# Altium PCB SOUL_EEG_PCB_Rev1.PcbDoc (part 2 of 2)
Units mil, origin at the board's own origin, x right, y up, seen from the top; angles counter-clockwise.
Board outline 3125 x 4300 mil, 4 copper layers (Top Layer, Upper Signal Layer, Lower Signal Layer, Bottom Layer), stack 30.635 mil thick; 183 components, 219 nets, 853 pads, 303 vias.
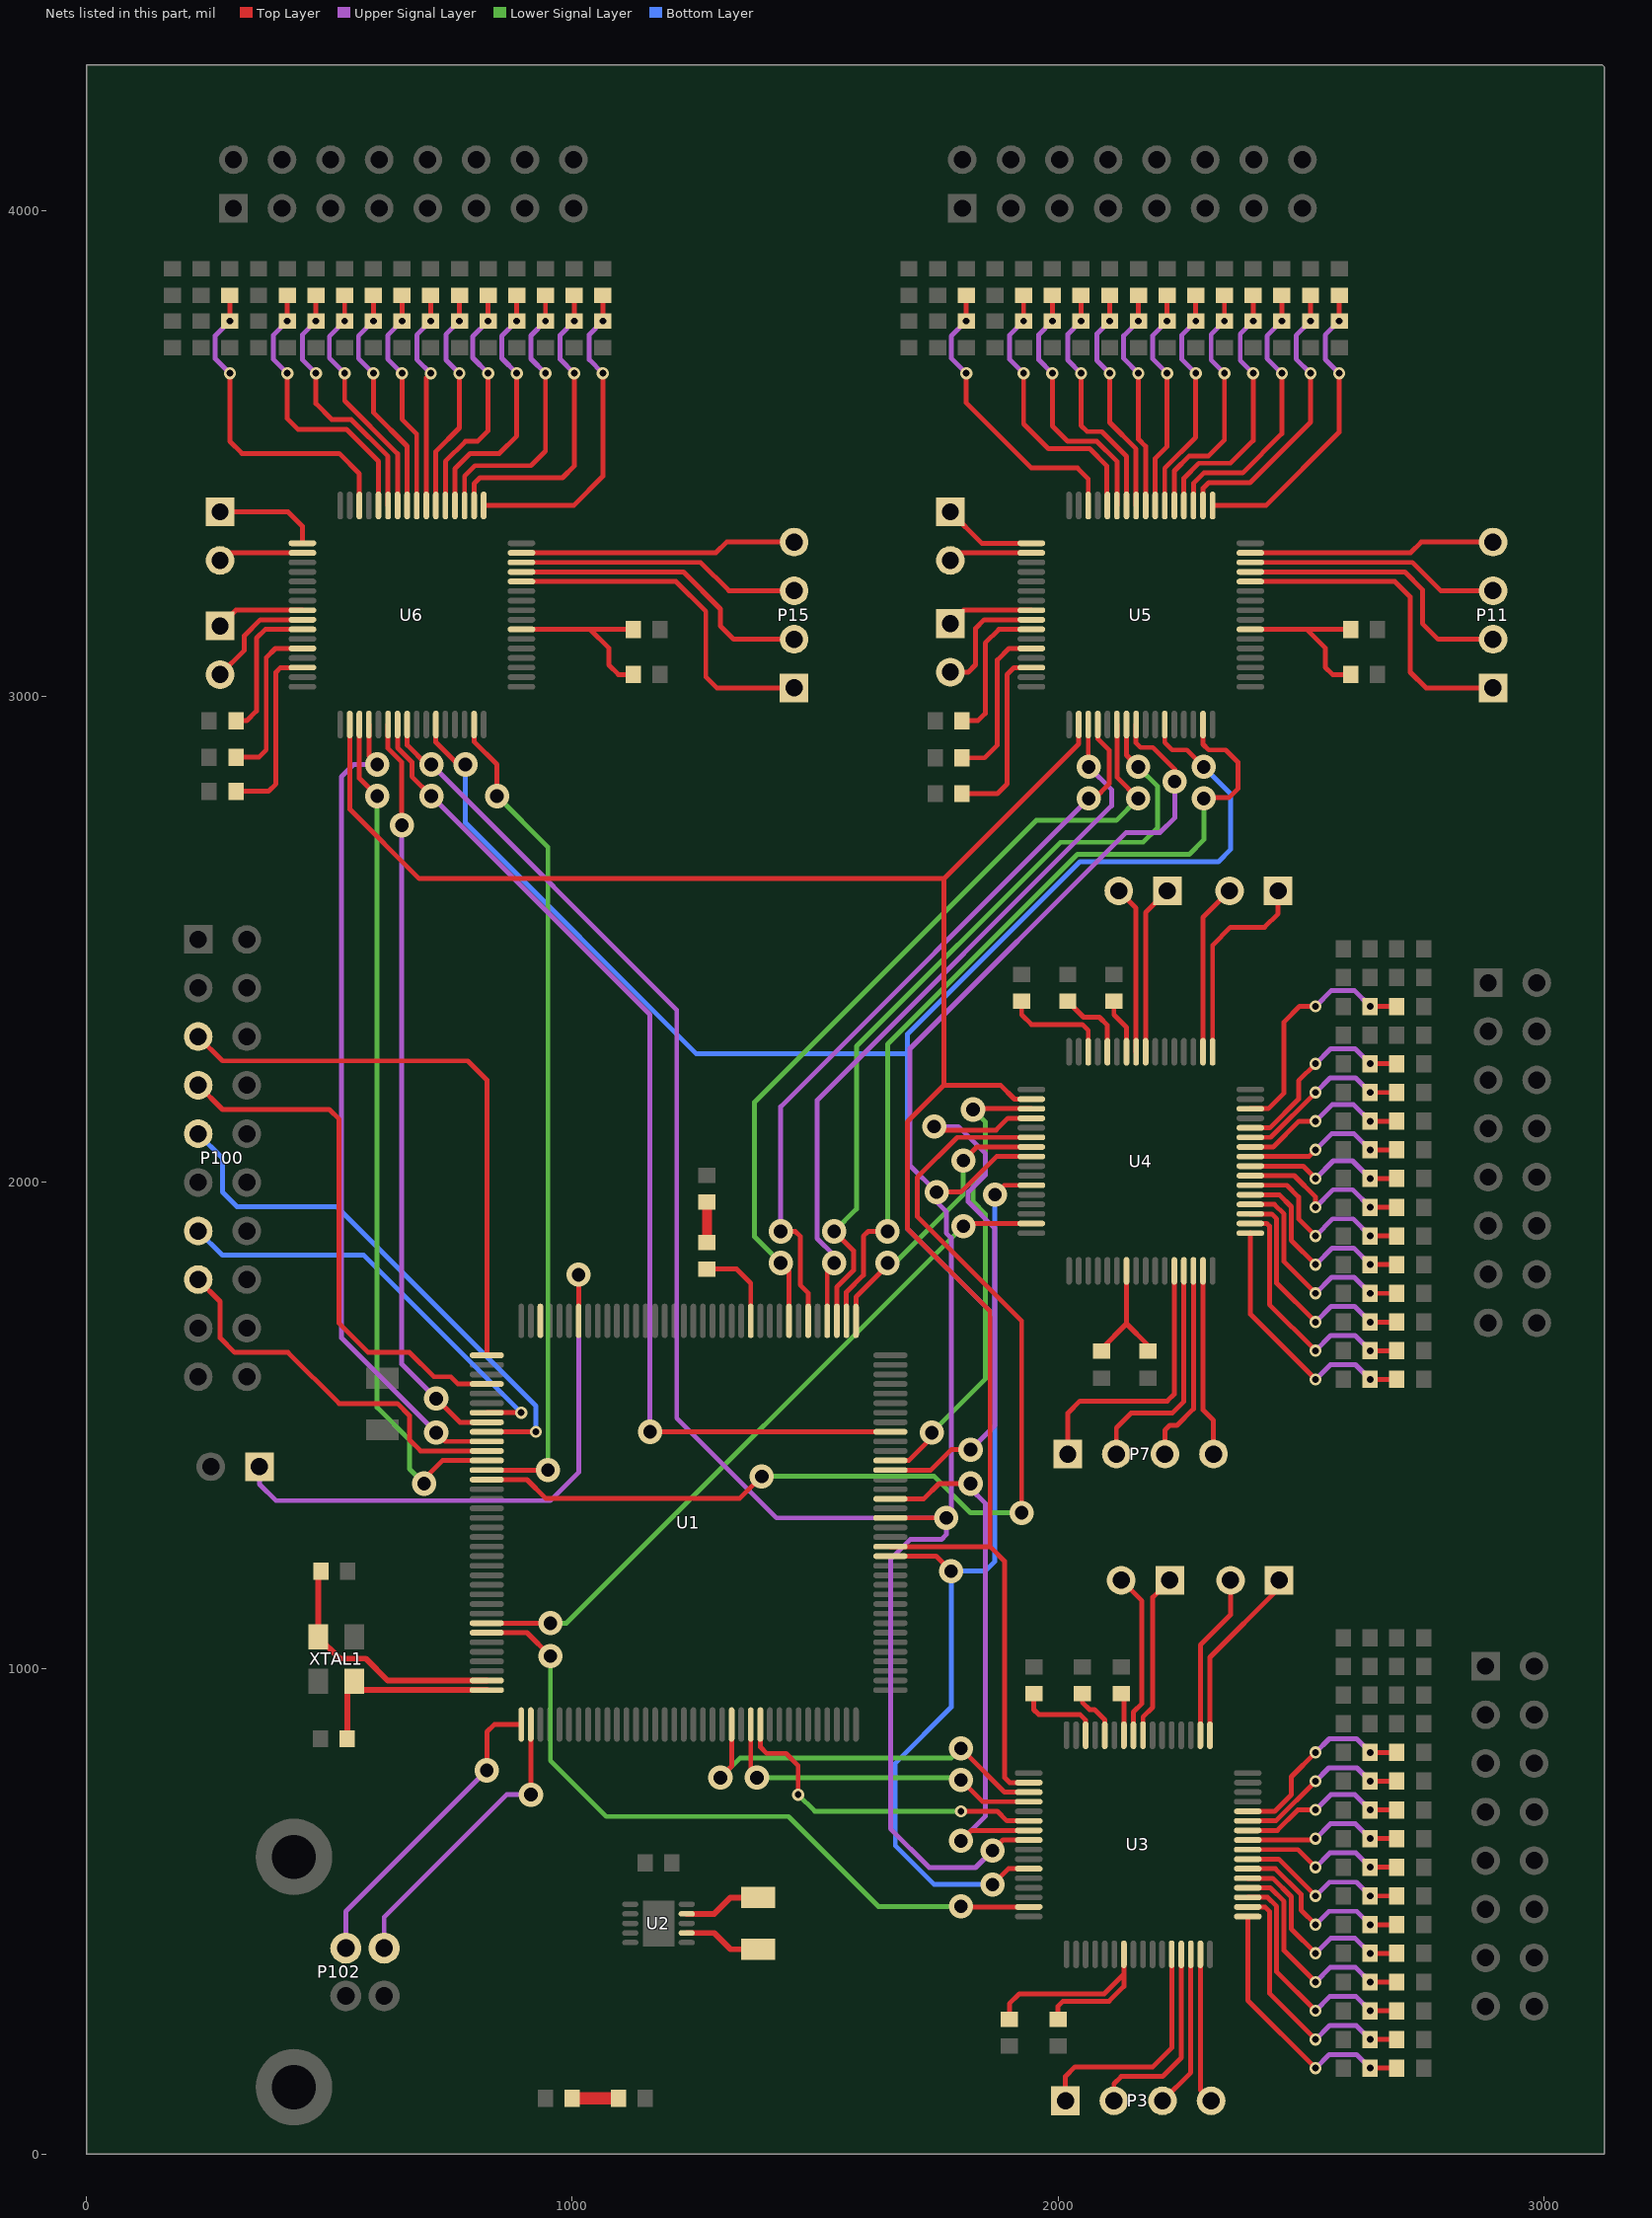
[diagram p4: the nets of this part, all layers, seen from the top]

## Via types
v1: diameter 25, hole 14, Top Layer to Bottom Layer, 218 vias
v2: diameter 50, hole 28, Top Layer to Bottom Layer, 80 vias
v3: diameter 19.68, hole 7.87, Top Layer to Bottom Layer, 5 vias

## Nets (pads, with @x,y where several pads share a name; then routed paths per layer and width w, separated by ;. In a path a pad name is that pad's centre, name@x,y a point inside that pad or via, vN(x,y) a via of type N, cw(c..) or ccw(c..) an arc to the next point about the centre after c; other vN are vias at no path point) (continued)
IN2P_2: C24.2 R19.1 U4.14 | length 501.8
  Top Layer w10: U4.14@2395.79,2151.61 2432.94,2151.61 2465,2183.68 2465,2330 2497.2,2362.2 v1(2530,2362.2) ; v1(2642.56,2362.2) R19.1@2697.44,2362.2
  Upper Signal Layer w10: v1(2530,2362.2) 2562.8,2395 2609.76,2395 v1(2642.56,2362.2)
IN2P_3: C45.2 R35.1 U5.14 | length 617.4
  Top Layer w10: v1(1811.02,3665) 1811.02,3603.98 1945,3470 2040,3470 2062.13,3447.87 U5.14@2062.13,3393.03 ; v1(1811.02,3772.56) R35.1@1811.02,3825.08
  Upper Signal Layer w10: v1(1811.02,3665) 1780,3696.02 1780,3741.54 v1(1811.02,3772.56)
IN2P_4: C66.2 R51.1 U6.14 | length 684.7
  Top Layer w10: v1(295.28,3665) 295.28,3524.72 320,3500 520,3500 561.73,3458.27 U6.14@561.73,3393.03 ; v1(295.28,3772.56) R51.1@295.28,3825.08
  Upper Signal Layer w10: v1(295.28,3665) 265,3695.28 265,3742.28 v1(295.28,3772.56)
IN3N_1: C6.1 R6.1 U3.11 | length 363.5
  Top Layer w10: U3.11@2390.39,686.06 2448.35,686.06 v1(2530,767.72) ; v1(2642.56,767.72) 2676.69,767.72 R6.1@2697.44,767.72
  Upper Signal Layer w10: v1(2530,767.72) 2557.28,795 2615.28,795 v1(2642.56,767.72)
IN3N_2: C27.1 R22.1 U4.11 | length 364.8
  Top Layer w10: U4.11@2395.79,2092.56 2437.52,2092.56 v1(2530,2185.04) ; v1(2642.56,2185.04) R22.1@2697.44,2185.04
  Upper Signal Layer w10: v1(2530,2185.04) 2559.96,2215 2612.6,2215 v1(2642.56,2185.04)
IN3N_3: C48.1 R38.1 U5.11 | length 545.6
  Top Layer w10: v1(1988.19,3665) 1988.19,3556.81 2020,3525 2080,3525 2121.18,3483.82 U5.11@2121.18,3393.03 ; v1(1988.19,3772.56) R38.1@1988.19,3825.08
  Upper Signal Layer w10: v1(1988.19,3665) 1960,3693.19 1960,3744.37 v1(1988.19,3772.56)
IN3N_4: C69.1 R54.1 U6.11 | length 539.7
  Top Layer w10: v1(472.44,3665) 472.44,3602.56 505,3570 545,3570 620.79,3494.21 U6.11@620.79,3393.03 ; v1(472.44,3772.56) R54.1@472.44,3825.08
  Upper Signal Layer w10: v1(472.44,3665) 445,3692.44 445,3745.12 v1(472.44,3772.56)
IN3P_1: C5.2 R5.1 U3.12 | length 402.1
  Top Layer w10: U3.12@2390.39,705.75 2445.75,705.75 2480,740 2480,776.77 v1(2530,826.77) ; v1(2642.56,826.77) R5.1@2697.44,826.77
  Upper Signal Layer w10: v1(2530,826.77) 2558.23,855 2614.33,855 v1(2642.56,826.77)
IN3P_2: C26.2 R21.1 U4.12 | length 404
  Top Layer w10: U4.12@2395.79,2112.24 2435.99,2112.24 2495,2171.25 2495,2209.09 v1(2530,2244.09) ; v1(2642.56,2244.09) R21.1@2697.44,2244.09
  Upper Signal Layer w10: v1(2530,2244.09) 2560.91,2275 2611.65,2275 v1(2642.56,2244.09)
IN3P_3: C47.2 R37.1 U5.12 | length 577.4
  Top Layer w10: v1(1929.13,3665) 1929.13,3560.87 1980,3510 2065,3510 2100,3475 2100,3394.53 U5.12@2101.5,3393.03 ; v1(1929.13,3772.56) R37.1@1929.13,3825.08
  Upper Signal Layer w10: v1(1929.13,3665) 1900,3694.13 1900,3743.43 v1(1929.13,3772.56)
IN3P_4: C68.2 R53.1 U6.12 | length 591.9
  Top Layer w10: v1(413.39,3665) 413.39,3571.61 435,3550 535,3550 601.1,3483.9 U6.12@601.1,3393.03 ; v1(413.39,3772.56) R53.1@413.39,3825.08
  Upper Signal Layer w10: v1(413.39,3665) 385,3693.39 385,3744.17 v1(413.39,3772.56)
IN4N_1: C8.1 R8.1 U3.9 | length 333.4
  Top Layer w10: U3.9@2390.39,646.69 2527.09,646.69 v1(2530,649.61) ; v1(2642.56,649.61) 2676.69,649.61 R8.1@2697.44,649.61
  Upper Signal Layer w10: v1(2530,649.61) 2560.39,680 2612.17,680 v1(2642.56,649.61)
IN4N_2: C29.1 R24.1 U4.9 | length 334.7
  Top Layer w10: U4.9@2395.79,2053.19 2516.26,2053.19 v1(2530,2066.93) ; v1(2642.56,2066.93) R24.1@2697.44,2066.93
  Upper Signal Layer w10: v1(2530,2066.93) 2563.07,2100 2609.49,2100 v1(2642.56,2066.93)
IN4N_3: C50.1 R40.1 U5.9 | length 476.3
  Top Layer w10: v1(2106.3,3665) 2106.3,3563.7 2160.55,3509.45 U5.9@2160.55,3393.03 ; v1(2106.3,3772.56) R40.1@2106.3,3825.08
  Upper Signal Layer w10: v1(2106.3,3665) 2080,3691.3 2080,3746.26 v1(2106.3,3772.56)
IN4N_4: C71.1 R56.1 U6.9 | length 486.2
  Top Layer w10: v1(590.55,3665) 590.55,3584.45 660,3515 660,3393.19 U6.9@660.16,3393.03 ; v1(590.55,3772.56) R56.1@590.55,3825.08
  Upper Signal Layer w10: v1(590.55,3665) 560,3695.55 560,3742.01 v1(590.55,3772.56)
IN4P_1: C7.2 R7.1 U3.10 | length 350.5
  Top Layer w10: U3.10@2390.39,666.38 2451.38,666.38 2493.66,708.66 v1(2530,708.66) ; v1(2642.56,708.66) R7.1@2697.44,708.66
  Upper Signal Layer w10: v1(2530,708.66) 2561.34,740 2611.22,740 v1(2642.56,708.66)
IN4P_2: C28.2 R23.1 U4.10 | length 351.8
  Top Layer w10: U4.10@2395.79,2072.87 2442.87,2072.87 2495.98,2125.98 v1(2530,2125.98) ; v1(2642.56,2125.98) R23.1@2697.44,2125.98
  Upper Signal Layer w10: v1(2530,2125.98) 2564.02,2160 2608.54,2160 v1(2642.56,2125.98)
IN4P_3: C49.2 R39.1 U5.10 | length 511
  Top Layer w10: v1(2047.24,3665) 2047.24,3557.76 2060,3545 2090,3545 2140.87,3494.13 U5.10@2140.87,3393.03 ; v1(2047.24,3772.56) R39.1@2047.24,3825.08
  Upper Signal Layer w10: v1(2047.24,3665) 2020,3692.24 2020,3745.32 v1(2047.24,3772.56)
IN4P_4: C70.2 R55.1 U6.10 | length 503.3
  Top Layer w10: v1(531.5,3665) 531.5,3608.5 640.47,3499.53 U6.10@640.47,3393.03 ; v1(531.5,3772.56) R55.1@531.5,3825.08
  Upper Signal Layer w10: v1(531.5,3665) 500,3696.5 500,3741.06 v1(531.5,3772.56)
IN5N_1: C10.1 R10.1 U3.7 | length 362.1
  Top Layer w10: U3.7@2390.39,607.32 2454.17,607.32 v1(2530,531.5) ; v1(2642.56,531.5) 2663.31,531.5 R10.1@2697.44,531.5
  Upper Signal Layer w10: v1(2530,531.5) 2558.5,560 2614.05,560 v1(2642.56,531.5)
IN5N_2: C31.1 R26.1 U4.7 | length 371
  Top Layer w10: U4.7@2395.79,2013.82 2486.18,2013.82 2530,1970 v1(2530,1948.82) ; v1(2642.56,1948.82) R26.1@2697.44,1948.82
  Upper Signal Layer w10: v1(2530,1948.82) 2566.18,1985 2606.38,1985 v1(2642.56,1948.82)
IN5N_3: C52.1 R42.1 U5.7 | length 466.6
  Top Layer w10: U5.7@2199.92,3393.03 2199.92,3489.92 2224.41,3514.41 v1(2224.41,3665) ; v1(2224.41,3772.56) R42.1@2224.41,3825.08
  Upper Signal Layer w10: v1(2224.41,3665) 2195,3694.41 2195,3743.15 v1(2224.41,3772.56)
IN5N_4: C73.1 R58.1 U6.7 | length 459.6
  Top Layer w10: U6.7@699.53,3393.03 699.53,3655.87 v1(708.66,3665) ; v1(708.66,3772.56) R58.1@708.66,3825.08
  Upper Signal Layer w10: v1(708.66,3665) 680,3693.66 680,3743.9 v1(708.66,3772.56)
IN5P_1: C9.2 R9.1 U3.8 | length 346.5
  Top Layer w10: U3.8@2390.39,627.01 2493.54,627.01 v1(2530,590.55) ; v1(2642.56,590.55) R9.1@2697.44,590.55
  Upper Signal Layer w10: v1(2530,590.55) 2559.45,620 2613.11,620 v1(2642.56,590.55)
IN5P_2: C30.2 R25.1 U4.8 | length 342.6
  Top Layer w10: U4.8@2395.79,2033.5 2504.37,2033.5 v1(2530,2007.87) ; v1(2642.56,2007.87) R25.1@2697.44,2007.87
  Upper Signal Layer w10: v1(2530,2007.87) 2566.55,2044.43 2606,2044.43 v1(2642.56,2007.87)
IN5P_3: C51.2 R41.1 U5.8 | length 463.4
  Top Layer w10: v1(2165.35,3665) 2165.35,3529.65 2180.24,3514.76 U5.8@2180.24,3393.03 ; v1(2165.35,3772.56) R41.1@2165.35,3825.08
  Upper Signal Layer w10: v1(2165.35,3665) 2135,3695.35 2135,3742.2 v1(2165.35,3772.56)
IN5P_4: C72.2 R57.1 U6.8 | length 469.1
  Top Layer w10: v1(649.61,3665) 649.61,3570.39 679.84,3540.16 U6.8@679.84,3393.03 ; v1(649.61,3772.56) R57.1@649.61,3825.08
  Upper Signal Layer w10: v1(649.61,3665) 620,3694.61 620,3742.95 v1(649.61,3772.56)
IN6N_1: C12.1 R12.1 U3.5 | length 436.3
  Top Layer w10: U3.5@2390.39,567.95 2442.05,567.95 2480,530 2480,463.39 v1(2530,413.39) ; v1(2642.56,413.39) 2676.69,413.39 R12.1@2697.44,413.39
  Upper Signal Layer w10: v1(2530,413.39) 2561.61,445 2610.94,445 v1(2642.56,413.39)
IN6N_2: C33.1 R28.1 U4.5 | length 430.2
  Top Layer w10: U4.5@2395.79,1974.45 2455.55,1974.45 2480,1950 2480,1880.71 v1(2530,1830.71) ; v1(2642.56,1830.71) R28.1@2697.44,1830.71
  Upper Signal Layer w10: v1(2530,1830.71) 2564.29,1865 2608.27,1865 v1(2642.56,1830.71)
IN6N_3: C54.1 R44.1 U5.5 | length 521
  Top Layer w10: U5.5@2239.29,3393.03 2239.29,3464.29 2270,3495 2310,3495 2342.52,3527.52 v1(2342.52,3665) ; v1(2342.52,3772.56) R44.1@2342.52,3825.08
  Upper Signal Layer w10: v1(2342.52,3665) 2315,3692.52 2315,3745.04 v1(2342.52,3772.56)
IN6N_4: C75.1 R60.1 U6.5 | length 509.4
  Top Layer w10: U6.5@738.9,3393.03 738.9,3483.9 780,3525 805,3525 826.77,3546.77 v1(826.77,3665) ; v1(826.77,3772.56) R60.1@826.77,3825.08
  Upper Signal Layer w10: v1(826.77,3665) 795,3696.77 795,3740.79 v1(826.77,3772.56)
IN6P_1: C11.2 R11.1 U3.6 | length 396.7
  Top Layer w10: U3.6@2390.39,587.64 2447.36,587.64 2500,535 2500,502.44 v1(2530,472.44) ; v1(2642.56,472.44) R11.1@2697.44,472.44
  Upper Signal Layer w10: v1(2530,472.44) 2557.56,500 2615,500 v1(2642.56,472.44)
IN6P_2: C32.2 R27.1 U4.6 | length 400.6
  Top Layer w10: U4.6@2395.79,1994.13 2470.87,1994.13 2495,1970 2495,1924.76 v1(2530,1889.76) ; v1(2642.56,1889.76) R27.1@2697.44,1889.76
  Upper Signal Layer w10: v1(2530,1889.76) 2565.24,1925 2607.32,1925 v1(2642.56,1889.76)
IN6P_3: C53.2 R43.1 U5.6 | length 482.1
  Top Layer w10: U5.6@2219.61,3393.03 2219.61,3469.61 2283.46,3533.46 v1(2283.46,3665) ; v1(2283.46,3772.56) R43.1@2283.46,3825.08
  Upper Signal Layer w10: v1(2283.46,3665) 2255,3693.46 2255,3744.09 v1(2283.46,3772.56)
IN6P_4: C74.2 R59.1 U6.6 | length 475.1
  Top Layer w10: U6.6@719.21,3393.03 719.21,3504.21 767.72,3552.72 v1(767.72,3665) ; v1(767.72,3772.56) R59.1@767.72,3825.08
  Upper Signal Layer w10: v1(767.72,3665) 740,3692.72 740,3744.84 v1(767.72,3772.56)
IN7N_1: C14.1 R14.1 U3.3 | length 507.2
  Top Layer w10: U3.3@2390.39,528.58 2431.42,528.58 2450,510 2450,375.28 v1(2530,295.28) ; v1(2642.56,295.28) 2676.69,295.28 R14.1@2697.44,295.28
  Upper Signal Layer w10: v1(2530,295.28) 2559.72,325 2612.83,325 v1(2642.56,295.28)
IN7N_2: C35.1 R30.1 U4.3 | length 498.2
  Top Layer w10: U4.3@2395.79,1935.08 2439.92,1935.08 2450,1925 2450,1792.6 v1(2530,1712.6) ; v1(2642.56,1712.6) R30.1@2697.44,1712.6
  Upper Signal Layer w10: v1(2530,1712.6) 2562.4,1745 2610.16,1745 v1(2642.56,1712.6)
IN7N_3: C56.1 R46.1 U5.3 | length 579.7
  Top Layer w10: U5.3@2278.66,3393.03 2278.66,3438.66 2300,3460 2380,3460 2460.63,3540.63 v1(2460.63,3665) ; v1(2460.63,3772.56) R46.1@2460.63,3825.08
  Upper Signal Layer w10: v1(2460.63,3665) 2430,3695.63 2430,3741.93 v1(2460.63,3772.56)
IN7N_4: C77.1 R62.1 U6.3 | length 593.2
  Top Layer w10: U6.3@778.27,3393.03 778.27,3453.27 800,3475 915,3475 944.88,3504.88 v1(944.88,3665) ; v1(944.88,3772.56) R62.1@944.88,3825.08
  Upper Signal Layer w10: v1(944.88,3665) 915,3694.88 915,3742.68 v1(944.88,3772.56)
IN7P_1: C13.2 R13.1 U3.4 | length 471.8
  Top Layer w10: U3.4@2390.39,548.27 2436.73,548.27 2465,520 2465,419.33 v1(2530,354.33) ; v1(2642.56,354.33) R13.1@2697.44,354.33
  Upper Signal Layer w10: v1(2530,354.33) 2560.67,385 2611.89,385 v1(2642.56,354.33)
IN7P_2: C34.2 R29.1 U4.4 | length 462.7
  Top Layer w10: U4.4@2395.79,1954.76 2445.24,1954.76 2465,1935 2465,1836.65 v1(2530,1771.65) ; v1(2642.56,1771.65) R29.1@2697.44,1771.65
  Upper Signal Layer w10: v1(2530,1771.65) 2563.35,1805 2609.21,1805 v1(2642.56,1771.65)
IN7P_3: C55.2 R45.1 U5.4 | length 551.2
  Top Layer w10: U5.4@2258.98,3393.03 2258.98,3448.98 2290,3480 2355,3480 2401.57,3526.57 v1(2401.57,3665) ; v1(2401.57,3772.56) R45.1@2401.57,3825.08
  Upper Signal Layer w10: v1(2401.57,3665) 2375,3691.57 2375,3745.98 v1(2401.57,3772.56)
IN7P_4: C76.2 R61.1 U6.4 | length 545.4
  Top Layer w10: U6.4@758.58,3393.03 758.58,3468.58 790,3500 850,3500 885.83,3535.83 v1(885.83,3665) ; v1(885.83,3772.56) R61.1@885.83,3825.08
  Upper Signal Layer w10: v1(885.83,3665) 855,3695.83 855,3741.73 v1(885.83,3772.56)
IN8N_1: C16.1 R16.1 U3.1 | length 560.4
  Top Layer w10: U3.1@2390.39,489.21 2390.39,316.77 v1(2530,177.17) ; v1(2642.56,177.17) 2663.31,177.17 R16.1@2697.44,177.17
  Upper Signal Layer w10: v1(2530,177.17) 2557.83,205 2614.72,205 v1(2642.56,177.17)
IN8N_2: C37.1 R32.1 U4.1 | length 549.5
  Top Layer w10: U4.1@2395.79,1895.71 2395.79,1728.7 v1(2530,1594.49) ; v1(2642.56,1594.49) R32.1@2697.44,1594.49
  Upper Signal Layer w10: v1(2530,1594.49) 2560.51,1625 2612.05,1625 v1(2642.56,1594.49)
IN8N_3: C58.1 R48.1 U5.1 | length 628.3
  Top Layer w10: U5.1@2318.03,3393.03 2428.03,3393.03 2578.74,3543.74 v1(2578.74,3665) ; v1(2578.74,3772.56) R48.1@2578.74,3825.08
  Upper Signal Layer w10: v1(2578.74,3665) 2550,3693.74 2550,3743.82 v1(2578.74,3772.56)
IN8N_4: C79.1 R64.1 U6.1 | length 665.5
  Top Layer w10: U6.1@817.64,3393.03 1003.03,3393.03 1062.99,3452.99 v1(1062.99,3665) ; v1(1062.99,3772.56) R64.1@1062.99,3825.08
  Upper Signal Layer w10: v1(1062.99,3665) 1035,3692.99 1035,3744.57 v1(1062.99,3772.56)
IN8P_1: C15.2 R15.1 U3.2 | length 542.7
  Top Layer w10: U3.2@2390.39,508.9 2426.1,508.9 2435,500 2435,331.22 v1(2530,236.22) ; v1(2642.56,236.22) R15.1@2697.44,236.22
  Upper Signal Layer w10: v1(2530,236.22) 2558.78,265 2613.78,265 v1(2642.56,236.22)
IN8P_2: C36.2 R31.1 U4.2 | length 530.8
  Top Layer w10: U4.2@2395.79,1915.39 2429.61,1915.39 2435,1910 2435,1748.54 v1(2530,1653.54) ; v1(2642.56,1653.54) R31.1@2697.44,1653.54
  Upper Signal Layer w10: v1(2530,1653.54) 2561.46,1685 2611.1,1685 v1(2642.56,1653.54)
IN8P_3: C57.2 R47.1 U5.2 | length 598.1
  Top Layer w10: U5.2@2298.35,3393.03 2298.35,3428.35 2310,3440 2395,3440 2519.68,3564.68 v1(2519.68,3665) ; v1(2519.68,3772.56) R47.1@2519.68,3825.08
  Upper Signal Layer w10: v1(2519.68,3665) 2490,3694.68 2490,3742.87 v1(2519.68,3772.56)
IN8P_4: C78.2 R63.1 U6.2 | length 640.9
  Top Layer w10: U6.2@797.95,3393.03 797.95,3437.95 810,3450 980,3450 1003.94,3473.94 v1(1003.94,3665) ; v1(1003.94,3772.56) R63.1@1003.94,3825.08
  Upper Signal Layer w10: v1(1003.94,3665) 975,3693.94 975,3743.62 v1(1003.94,3772.56)
NetL1_1: L1.1 U2.4 | length 160.8
  Top Layer w12: U2.4@1235.63,494.68 1292.24,494.68 1325.71,528.15 L1.1@1382.56,528.15
NetL1_2: L1.2 U2.2 | length 160.8
  Top Layer w12: U2.2@1235.63,455.31 1292.24,455.31 1325.71,421.85 L1.2@1382.56,421.85
NetLED1_1: LED1.1 R200.2 | length 94.9
  Top Layer w25: R200.2@1000.12,115 LED1.1@1095,115
NetLED2_1: LED2.1 R300.2 | length 83.1
  Top Layer w20: R300.2@1277.44,1876.69 LED2.1@1277.44,1959.76
NetP2_1: P2.1 U3.24 | length 341.7
  Top Layer w10: U3.24@2174.84,862.24 2174.84,899.84 2195,920 2195,1146.1 P2.1@2230,1181.1
NetP2_2: P2.2 U3.25 | length 343.6
  Top Layer w10: P2.2@2130,1181.1 2172.5,1138.6 2172.5,927.5 2155.16,910.16 U3.25@2155.16,862.24
NetP3_1: P3.1 U3.60 | length 485.9
  Top Layer w10: P3.1@2015,110 2015,160 2035,180 2195,180 2233.9,218.9 U3.60@2233.9,411.46
NetP3_2: P3.2 U3.61 | length 408.7
  Top Layer w10: P3.2@2115,110 2115,145 2130,160 2215,160 2253.58,198.58 U3.61@2253.58,411.46
NetP3_3: P3.3 U3.62 | length 325.6
  Top Layer w10: P3.3@2215,110 2273.27,168.27 U3.62@2273.27,411.46
NetP3_4: P3.4 U3.63 | length 310.6
  Top Layer w10: U3.63@2292.95,411.46 2292.95,132.05 P3.4@2315,110
NetP4_1: P4.1 U3.17 | length 377.8
  Top Layer w10: U3.17@2312.64,862.24 2312.64,1022.64 2455,1165 P4.1@2455,1181.1
NetP4_2: P4.2 U3.18 | length 344.6
  Top Layer w10: U3.18@2292.95,862.24 2292.95,1047.95 2355,1110 P4.2@2355,1181.1
NetP6_1: P6.1 U4.24 | length 349.8
  Top Layer w10: U4.24@2180.24,2268.74 2180.24,2555.24 P6.1@2225,2600
NetP6_2: P6.2 U4.25 | length 346
  Top Layer w10: P6.2@2125,2600 2160.55,2564.45 U4.25@2160.55,2268.74
NetP7_1: P7.1 U4.60 | length 573.3
  Top Layer w10: P7.1@2020,1440.94 2020,1525 2045,1550 2225,1550 2239.29,1564.29 U4.60@2239.29,1817.95
NetP7_2: P7.2 U4.61 | length 484.4
  Top Layer w10: P7.2@2120,1440.94 2120,1495 2150,1525 2235,1525 2258.98,1548.98 U4.61@2258.98,1817.95
NetP7_3: P7.3 U4.62 | length 410.1
  Top Layer w10: P7.3@2220,1440.94 2220,1490 2230,1500 2245,1500 2278.66,1533.66 U4.62@2278.66,1817.95
NetP7_4: P7.4 U4.63 | length 386
  Top Layer w10: U4.63@2298.35,1817.95 2298.35,1531.65 2320,1510 P7.4@2320,1440.94
NetP8_1: P8.1 U4.17 | length 428.1
  Top Layer w10: U4.17@2318.03,2268.74 2318.03,2488.03 2355,2525 2425,2525 2452.88,2552.88 P8.1@2452.88,2600
NetP8_2: P8.2 U4.18 | length 353.8
  Top Layer w10: U4.18@2298.35,2268.74 2298.35,2545.47 P8.2@2352.88,2600
NetP10_1: P10.1 U5.24 | length 178.1
  Top Layer w10: P10.1@1778.32,3150 1805.8,3177.48 U5.24@1945,3177.48
NetP10_2: P10.2 U5.25 | length 255.3
  Top Layer w10: P10.2@1778.32,3050 1815,3050 1830,3065 1830,3140 1847.8,3157.8 U5.25@1945,3157.8
NetP11_1: P11.1 U5.60 | length 681.1
  Top Layer w10: U5.60@2395.79,3236.54 2693.46,3236.54 2725,3205 2725,3050 2757.36,3017.64 P11.1@2895.39,3017.64
NetP11_2: P11.2 U5.61 | length 598
  Top Layer w10: U5.61@2395.79,3256.22 2713.78,3256.22 2750,3220 2750,3150 2782.36,3117.64 P11.2@2895.39,3117.64
NetP11_3: P11.3 U5.62 | length 523.7
  Top Layer w10: U5.62@2395.79,3275.91 2729.09,3275.91 2787.36,3217.64 P11.3@2895.39,3217.64
NetP11_4: P11.4 U5.63 | length 508.7
  Top Layer w10: U5.63@2395.79,3295.59 2725.59,3295.59 2747.64,3317.64 P11.4@2895.39,3317.64
NetP12_1: P12.1 U5.17 | length 193.5
  Top Layer w10: P12.1@1778.31,3380 1843.03,3315.28 U5.17@1945,3315.28
NetP12_2: P12.2 U5.18 | length 173.2
  Top Layer w10: P12.2@1778.31,3280 1793.9,3295.59 U5.18@1945,3295.59
NetP14_1: P14.1 U6.24 | length 183.1
  Top Layer w10: P14.1@275,3145 307.48,3177.48 U6.24@444.61,3177.48
NetP14_2: P14.2 U6.25 | length 233.9
  Top Layer w10: P14.2@275,3045 325,3095 325,3125 357.8,3157.8 U6.25@444.61,3157.8
NetP15_1: P15.1 U6.60 | length 731.1
  Top Layer w10: U6.60@895.39,3236.54 1213.46,3236.54 1275,3175 1275,3040 1297.36,3017.64 P15.1@1456.69,3017.64
NetP15_2: P15.2 U6.61 | length 639.2
  Top Layer w10: U6.61@895.39,3256.22 1228.78,3256.22 1305,3180 1305,3145 1332.36,3117.64 P15.2@1456.69,3117.64
NetP15_3: P15.3 U6.62 | length 585.4
  Top Layer w10: U6.62@895.39,3275.91 1264.09,3275.91 1322.36,3217.64 P15.3@1456.69,3217.64
NetP15_4: P15.4 U6.63 | length 570.4
  Top Layer w10: U6.63@895.39,3295.59 1295.59,3295.59 1317.64,3317.64 P15.4@1456.69,3317.64
NetP16_1: P16.1 U6.17 | length 217
  Top Layer w10: P16.1@275,3380 415,3380 444.61,3350.39 U6.17@444.61,3315.28
NetP16_2: P16.2 U6.18 | length 176.1
  Top Layer w10: P16.2@275,3280 290.59,3295.59 U6.18@444.61,3295.59
NetP100_5: P100.5 U1.1 | length 1197.8
  Top Layer w10: P100.5@230,2300 280,2250 785,2250 824.13,2210.87 U1.1@824.13,1644.13
NetP100_7: P100.7 U1.4 | length 1094.9
  Top Layer w10: P100.7@230,2200 280,2150 500,2150 520,2130 520,1710 580,1650 665,1650 715,1600 750,1600 764.92,1585.08 U1.4@824.13,1585.08
NetP100_9: P100.9 U1.9 | length 1122.2
  Top Layer w10: U1.9@824.13,1486.65 v1(925,1486.65)
  Bottom Layer w10: P100.9@230,2100 280,2050 280,1980 310,1950 515,1950 925,1540 v1(925,1486.65)
NetP100_13: P100.13 U1.7 | length 890.8
  Top Layer w10: U1.7@824.13,1526.02 v1(895,1526.02)
  Bottom Layer w10: P100.13@230,1900 280,1850 571.02,1850 v1(895,1526.02)
NetP100_15: P100.15 U1.11 | length 813.5
  Top Layer w10: P100.15@230,1800 275,1755 275,1680 305,1650 415,1650 520,1545 640,1545 665,1520 665,1470 687.72,1447.28 U1.11@824.13,1447.28
NetP101_1: P101.1 U1.138 | length 1233.2
  Top Layer w10: U1.138@1013.11,1715 v2(1013.11,1810)
  Upper Signal Layer w10: P101.1@355.91,1415 355.91,1379.09 390,1345 955,1345 1013.11,1403.11 v2(1013.11,1810)
NetP102_2: P102.2 U1.38 | length 614.9
  Top Layer w10: U1.38@914.69,884.29 915,883.98 v2(915,740)
  Upper Signal Layer w10: P102.2@612.72,424.21 612.72,488.03 864.69,740 v2(915,740)
NetP102_3: P102.3 U1.37 | length 642.3
  Top Layer w10: v2(824.13,790) 824.13,869.13 839.29,884.29 U1.37@895,884.29
  Upper Signal Layer w10: P102.3@533.98,424.21 533.98,499.84 v2(824.13,790)
NetR300_1: R300.1 U1.120 | length 179.6
  Top Layer w10: R300.1@1277.44,1821.57 1338.43,1821.57 1367.44,1792.56 U1.120@1367.44,1715
NetU1_8: U1.8 U6.38 | length 1552.6
  Top Layer w10: U6.38@620.79,2942.24 620.79,2893 649.17,2864.62 v2(649.17,2735) ; v2(720,1555) 768.66,1506.34 U1.8@824.13,1506.34
  Upper Signal Layer w10: v2(649.17,2735) 649.17,1625.83 v2(720,1555)
NetU1_10: U1.10 U6.36 | length 1715.3
  Top Layer w10: U6.36@581.42,2942.24 581.42,2876.92 v2(598.33,2860) ; v2(720,1485) 738.03,1466.97 U1.10@824.13,1466.97
  Upper Signal Layer w10: v2(598.33,2860) 550,2860 525,2835 525,1680 v2(720,1485)
NetU1_12: U1.12 U6.35 | length 1772.2
  Top Layer w10: U6.35@561.73,2942.24 561.73,2831.6 v2(598.33,2795) ; v2(695,1380) 695,1390 732.6,1427.6 U1.12@824.13,1427.6
  Lower Signal Layer w10: v2(598.33,2795) 598.33,1536.67 665,1470 665,1410 v2(695,1380)
NetU1_13: U1.13 U6.47 | length 1723.2
  Top Layer w10: U6.47@797.95,2942.24 797.95,2907.05 845,2860 v2(845,2795) ; U1.13@824.13,1407.91 v2(950,1407.91)
  Lower Signal Layer w10: v2(845,2795) 950,2690 v2(950,1407.91)
NetU1_14: U1.14 U4.38 | length 2214.7
  Top Layer w10: U1.14@824.13,1388.23 906.77,1388.23 945,1350 1345,1350 v2(1390,1395) ; v2(1925,1320) 1925,1715 1710,1930 1710,2010 1792.56,2092.56 U4.38@1945,2092.56
  Lower Signal Layer w10: v2(1390,1395) 1745,1395 1820,1320 v2(1925,1320)
NetU1_29: U1.29 U4.47 | length 1453.9
  Top Layer w10: U1.29@824.13,1092.95 v2(955,1092.95) ; v2@1810.39,1915.39 U4.47@1945,1915.39
  Lower Signal Layer w10: v2(955,1092.95) 987.95,1092.95 v2(1805,1910)
NetU1_30: U1.30 U3.47 | length 1475.2
  Top Layer w10: U1.30@824.13,1073.27 906.73,1073.27 v2(955,1025) ; v2(1800,510) 1801.1,508.9 U3.47@1939.61,508.9
  Lower Signal Layer w10: v2(955,1025) 955,810 1070,695 1445,695 1630,510 v2(1800,510)
NetU1_59: U1.59 U3.35 | length 811.4
  Top Layer w10: v2(1305,775) 1328.07,798.07 U1.59@1328.07,884.29 ; v2@1810,835 1810,825 1889.88,745.12 U3.35@1939.61,745.12
  Lower Signal Layer w10: v2(1305,775) 1345,815 1780,815 v2(1800,835)
NetU1_61: U1.61 U3.36 | length 694.6
  Top Layer w10: U1.61@1367.44,884.29 1367.44,787.56 v2(1380,775) ; v2(1800,770) 1844.57,725.43 U3.36@1939.61,725.43
  Lower Signal Layer w10: v2(1380,775) 1795,775 v2(1800,770)
NetU1_62: U1.62 U3.38 | length 696.9
  Top Layer w10: U1.62@1387.13,884.29 1387.13,837.87 1400,825 1440,825 1465,800 v1(1465,740) ; v1(1800,705.83) 1874.88,705.83 1894.65,686.06 U3.38@1939.61,686.06
  Lower Signal Layer w10: v1(1465,740) 1499.17,705.83 v1(1800,705.83)
NetU1_87: U1.87 U3.43 U4.43 U5.43 U6.43 | length 5158.8
  Top Layer w10: U6.43@719.21,2942.24 719.21,2905.79 765,2860 v2(780,2860) ; U1.87@1654.84,1230.75 1749.25,1230.75 v2(1780,1200) ; v2(1865,555) 1897.64,587.64 U3.43@1939.61,587.64 ; v2(1870,1975) 1889.13,1994.13 U4.43@1945,1994.13 ; U5.43@2219.61,2942.24 2219.61,2905.39 2235,2890 2265,2890 v2(2300,2855)
  Bottom Layer w10: v2(780,2860) 780,2740 1255,2265 1690,2265 ; v2(1865,555) 1745,555 1665,635 1665,805 1780,920 v2(1780,1200) 1850,1200 1870,1220 1870,1725 ; v2(1870,1975) 1870,1725 ; v2(2300,2855) 2355,2800 2355,2685 2330,2660 2045,2660 1690,2305 1690,2265 ; 1690,2265 1690,1905 1870,1725
NetU1_88: U1.88 U3.34 U4.34 U5.34 U6.34 | length 4303.4
  Top Layer w10: U6.34@542.05,2942.24 542.05,2767.95 685,2625 1765,2625 ; U1.88@1654.84,1250.43 1860,1250.43 ; U3.34@1939.61,764.8 1900.2,764.8 1890,775 1890,1220.43 1860,1250.43 ; U4.34@1945,2171.3 1910.24,2171.3 1881.54,2200 1765,2200 ; U5.34@2042.44,2942.24 2042.44,2902.44 1765,2625 ; 1765,2200 1765,2625 ; 1765,2200 1690,2125 1690,1905 1860,1735 1860,1250.43
NetU1_91: U1.91 U3.40 U4.40 U5.40 U6.40 | length 5681.6
  Top Layer w10: U6.40@660.16,2942.24 660.16,2899.84 700,2860 v2(710,2860) ; U1.91@1654.84,1309.49 v2@1764.49,1309.49 ; v2(1750,1980) 1800,1980 1873.19,2053.19 U4.40@1945,2053.19 ; v2@1768.27,1313.27 v2@1770,1315 ; v2(1865,625) 1886.69,646.69 U3.40@1939.61,646.69 ; U5.40@2160.55,2942.24 2160.55,2904.45 2170,2895 2195,2895 2240,2850 v2(2240,2825)
  Upper Signal Layer w10: v2(710,2860) 1215,2355 1215,1515 1420.51,1309.49 v2(1770,1309.49) 1770,1275 1760,1265 1695.51,1265 1655,1224.49 1655,670 1735,590 1830,590 v2(1865,625) ; v2@1740,1970 1770,1940 1770,1895.5 1780,1885.5 1780,1325 v2@1770,1315 ; v2(1750,1980) 1695,2035 1695,2275 2140,2720 2210,2720 2240,2750 v2(2240,2825)
NetU1_93: U1.93 U3.39 | length 1094.7
  Top Layer w10: U1.93@1654.84,1348.86 1723.86,1348.86 1755,1380 v2(1820,1380) ; v2(1800,645) 1821.38,666.38 U3.39@1939.61,666.38
  Upper Signal Layer w10: v2(1800,645) 1850,695 1850,1340 1820,1370 v2(1820,1380)
NetU1_96: U1.96 U4.36 | length 1194.9
  Top Layer w10: U1.96@1654.84,1407.91 1737.91,1407.91 1780,1450 v2(1820,1450) ; v2(1745,2115) 1745,2109.28 1746.73,2107.56 1872.56,2107.56 1896.93,2131.93 U4.36@1945,2131.93
  Upper Signal Layer w10: v2(1745,2115) 1795,2115 1850,2060 1850,2015 1815,1980 1815,1960 1870,1905 1870,1500 v2(1820,1450)
NetU1_97: U1.97 U4.35 | length 974.8
  Top Layer w10: U1.97@1654.84,1427.6 1692.6,1427.6 1740,1475 v2(1740,1485) ; v2@1826.61,2151.61 U4.35@1945,2151.61
  Lower Signal Layer w10: v2(1740,1485) 1850,1595 1850,1935 1825,1960 1825,2000 1850,2025 1850,2125 v2(1825,2150)
NetU1_100: U1.100 U6.39 | length 2165.6
  Top Layer w10: U6.39@640.47,2942.24 640.47,2894.53 670,2865 670,2835 v2(710,2795) ; v2(1160,1486.65) U1.100@1654.84,1486.65
  Upper Signal Layer w10: v2(710,2795) 1160,2345 v2(1160,1486.65)
NetU1_109: U1.109 U4.39 | length 581.9
  Top Layer w10: U1.109@1583.98,1715 1583.98,1763.98 1649.13,1829.13 v2(1649.13,1834.13) ; v2(1805,2045) 1832.87,2072.87 U4.39@1945,2072.87
  Lower Signal Layer w10: v2(1649.13,1834.13) 1664.13,1834.13 1805,1975 v2(1805,2045)
NetU1_110: U1.110 U5.47 | length 1801.9
  Top Layer w10: U1.110@1564.29,1715 1564.29,1774.29 1599.13,1809.13 1599.13,1889.13 1609.13,1899.13 v2(1649.13,1899.13) ; U5.47@2298.35,2942.24 2298.35,2901.65 2310,2890 2345,2890 2370,2865 2370,2810 2351.65,2791.65 2298.35,2791.65 v2(2300,2790)
  Lower Signal Layer w10: v2(1649.13,1899.13) 1649.13,2284.13 2040,2675 2270,2675 2300,2705 v2(2300,2790)
NetU1_111: U1.111 U5.39 | length 1660.1
  Top Layer w10: v2(1539.13,1899.13) 1579.13,1859.13 1579.13,1819.13 1544.61,1784.61 U1.111@1544.61,1715 ; U5.39@2140.87,2942.24 2140.87,2879.13 v2(2165,2855)
  Lower Signal Layer w10: v2(1539.13,1899.13) 1585,1945 1585,2280 2005,2700 2175,2700 2205,2730 2205,2815 v2(2165,2855)
NetU1_112: U1.112 U5.35 | length 1516.7
  Top Layer w10: U1.112@1524.92,1715 1524.92,1819.92 v2(1539.13,1834.13) ; v2@2062.13,2856.21 U5.35@2062.13,2942.24
  Upper Signal Layer w10: v2(1539.13,1834.13) 1539.13,1849.64 1504.13,1884.64 1504.13,2169.13 2110,2775 2110,2808.33 v2(2063.33,2855)
NetU1_114: U1.114 U5.36 | length 1564.6
  Top Layer w10: v2(1429.13,1899.13) 1459.13,1899.13 1469.13,1889.13 1469.13,1789.13 1485.55,1772.72 U1.114@1485.55,1715 ; v2(2063.33,2790) 2075,2790 2105,2820 2105,2890 2081.81,2913.19 U5.36@2081.81,2942.24
  Upper Signal Layer w10: v2(1429.13,1899.13) 1429.13,2155.8 v2(2063.33,2790)
NetU1_116: U1.116 U5.38 | length 1700.4
  Top Layer w10: v2(1429.13,1834.13) 1446.18,1817.09 U1.116@1446.18,1715 ; U5.38@2120,2941.06 U5.38@2121.18,2942.24 2121.18,2833.82 v2(2165,2790)
  Lower Signal Layer w10: v2(1429.13,1834.13) 1375,1888.27 1375,2165 1955,2745 2120,2745 v2(2165,2790)
NetU1_142: U1.142
VCAP1_1: C17.1 U3.28 | length 110.2
  Top Layer w10: C17.1@2050,947.44 2050,930 2065,915 2075,915 2096.1,893.9 U3.28@2096.1,862.24
VCAP1_2: C38.1 U4.28 | length 156.5
  Top Layer w10: C38.1@2020,2372.44 2052.44,2340 2085,2340 2101.5,2323.5 U4.28@2101.5,2268.74
VCAP1_3: C59.1 U5.28 | length 338.2
  Top Layer w10: C59.1@1802.56,2873.74 1848.74,2873.74 1875,2900 1875,3075 1898.74,3098.74 U5.28@1945,3098.74
VCAP1_4: C80.1 U6.28 | length 341
  Top Layer w10: C80.1@307.56,2875 355,2875 370,2890 370,3080 388.74,3098.74 U6.28@444.61,3098.74
VCAP2_1: C18.2 U3.30 | length 179.2
  Top Layer w10: C18.2@1950,947.44 1950,915 1960,905 2045,905 2056.73,893.27 U3.30@2056.73,862.24
VCAP2_2: C39.2 U4.30 | length 222
  Top Layer w10: C39.2@1925,2372.44 1925,2345 1945,2325 2050,2325 2062.13,2312.87 U4.30@2062.13,2268.74
VCAP2_3: C60.2 U5.30 | length 381.7
  Top Layer w10: C60.2@1802.56,2800 1875,2800 1895,2820 1895,3045 1909.37,3059.37 U5.30@1945,3059.37
VCAP2_4: C81.2 U6.30 | length 377.1
  Top Layer w10: C81.2@307.56,2805 375,2805 390,2820 390,3050 399.37,3059.37 U6.30@444.61,3059.37
VCAP3_1: C19.1 C20.2 U3.55 | length 538.6
  Top Layer w10: C20.2@1900,277.56 1900,310 1920,330 2095,330 2135.47,370.47 ; C19.1@2000,277.56 2000,305 2010,315 2105,315 2135.47,345.47 2135.47,370.47 ; U3.55@2135.47,411.46 2135.47,370.47
VCAP3_2: C40.1 C41.2 U4.55 | length 261.3
  Top Layer w10: C41.2@2090,1652.56 2090,1658.27 2140.87,1709.13 ; U4.55@2140.87,1817.95 2140.87,1709.13 ; C40.1@2185,1652.56 2185,1665 2140.87,1709.13
VCAP3_3: C61.1 C62.2 U5.55 | length 359.2
  Top Layer w10: U5.55@2395.79,3138.11 2511.89,3138.11 ; C61.1@2602.44,3045 2565,3045 2550,3060 2550,3100 2511.89,3138.11 ; C62.2@2602.44,3138.11 2511.89,3138.11
VCAP3_4: C82.1 C83.2 U6.55 | length 378.3
  Top Layer w10: U6.55@895.39,3138.11 1036.89,3138.11 ; C82.1@1125.76,3045 1095,3045 1075,3065 1075,3100 1036.89,3138.11 ; C83.2@1125.76,3138.11 1036.89,3138.11
VCAP4_1: C21.2 U3.26 | length 87.5
  Top Layer w10: C21.2@2130,947.44 2135.47,941.97 U3.26@2135.47,862.24
VCAP4_2: C42.2 U4.26 | length 114.4
  Top Layer w10: C42.2@2115,2372.44 2115,2345 2140.87,2319.13 U4.26@2140.87,2268.74
VCAP4_3: C63.2 U5.26 | length 305.3
  Top Layer w10: C63.2@1802.56,2950 1835,2950 1850,2965 1850,3110 1878.11,3138.11 U5.26@1945,3138.11
VCAP4_4: C84.2 U6.26 | length 302.8
  Top Layer w10: C84.2@307.56,2950 330,2950 350,2970 350,3120 368.11,3138.11 U6.26@444.61,3138.11
XIN: C101.2 U1.36 XTAL1.3 | length 404.9
  Top Layer w12: C101.2@536.69,855 536.69,958.96 XTAL1.3@551.13,973.4 569.37,955.16 U1.36@824.13,955.16
XOUT: C102.1 U1.35 XTAL1.1 | length 521.9
  Top Layer w12: C102.1@482.44,1200 477.13,1194.69 XTAL1.1@477.13,1064.4 521.53,1020 575,1020 620.16,974.84 U1.35@824.13,974.84
pads on no net: P100.3 P100.17 P100.19 P102.MH U1.5 U1.6 U1.15 U1.19 U1.20 U1.21 U1.22 U1.23 U1.24 U1.25 U1.26 U1.28 U1.31 U1.32 U1.39 U1.41 U1.42 U1.45 U1.46 U1.47 U1.48 U1.49 U1.53 U1.54 U1.55 U1.56 U1.57 U1.58 U1.63 U1.64 U1.65 U1.66 U1.67 U1.68 U1.69 U1.70 U1.71 U1.72 U1.74 U1.76 U1.77 U1.78 U1.79 U1.80 U1.81 U1.82 U1.83 U1.84 U1.89 U1.90 U1.92 U1.94 U1.95 U1.98 U1.99 U1.101 U1.102 U1.103 U1.104 U1.105 U1.106 U1.107 U1.108 U1.113 U1.115 U1.117 U1.118 U1.119 U1.121 U1.122 U1.123 U1.124 U1.125 U1.126 U1.128 U1.129 U1.130 U1.131 U1.132 U1.133 U1.134 U1.135 U1.136 U1.137 U1.139 U1.140 U1.141 U1.143 U1.144 U3.27 U3.29 U3.31 U3.37 U3.41 U3.42 U3.44 U3.45 U3.46 U3.64 U4.27 U4.29 U4.31 U4.37 U4.41 U4.42 U4.44 U4.45 U4.46 U4.64 U5.27 U5.29 U5.31 U5.37 U5.41 U5.42 U5.44 U5.45 U5.46 U5.64 U6.27 U6.29 U6.31 U6.37 U6.41 U6.42 U6.44 U6.45 U6.46 U6.64

## Polygon pours and split planes (outlines as drawn)
5V on Top Layer "5V Plane 3" (solid, remove dead copper, pour order 11): 2005,2955 2300,2955 2385,3040 2385,3335 2340,3380 2005,3380 1960,3335 1960,3000
5V on Top Layer "5V Plane 1" (solid, remove dead copper, pour order 9): 2030,425 2330,425 2375,470 2375,805 2330,850 2000,850 1950,800 1950,505
5V on Top Layer "5V Plane 2" (solid, remove dead copper, pour order 10): 2040,1835 2335,1835 2380,1880 2380,2215 2335,2260 2005,2260 1955,2210 1955,1920
5V on Top Layer "5V Plane 4" (solid, remove dead copper, pour order 13): 500,2955 795,2955 880,3040 880,3335 835,3380 500,3380 455,3335 455,3000
3.3V on Top Layer "3.3V Power Plane" (solid, remove dead copper, pour order 14): 0,0 3125,0 3125,4300 0,4300
1.8V on Top Layer "1.8V Plane" (solid, remove dead copper, pour order 8): 845,1680 1630,1680 1630,920 845,920
5V on Top Layer "5V Converter Plane" (solid, remove dead copper, pour order 12): 975,625 1325,625 1325,450 975,450
GND on Bottom Layer "Ground" (solid, remove dead copper, pour order 15): 0,0 0,4300 3125,4300 3125,0

## Silkscreen, mask and mechanical layers (free items; w line width, h text height)
Top Overlay:
  text "Luke Metro" at 2820,4235 h60
  text "1" at 292.52,4205 h60
  text "2" at 382.52,4205 h60
  text "3" at 482.52,4205 h60
  text "4" at 582.52,4205 h60
  text "5" at 682.52,4205 h60
  text "6" at 782.52,4205 h60
  text "7" at 882.52,4205 h60
  text "8" at 982.52,4205 h60
  text "1" at 1792.91,4205 h60
  text "2" at 1882.91,4205 h60
  text "3" at 1982.91,4205 h60
  text "4" at 2082.91,4205 h60
  text "5" at 2182.91,4205 h60
  text "6" at 2282.91,4205 h60
  text "7" at 2382.91,4205 h60
  text "8" at 2482.91,4205 h60
  text "4/19/2015" at 2842,4185 h60
  text "#4" at 1140,4023.08 h98.43
  text "#3" at 2635,4023.12 h98.43
  text "R" at 120,3824.38 h98.43 r90
  text "R" at 1640,3824.38 h98.43 r90
  text "C" at 120,3717.52 h98.43 r90
  text "C" at 1640,3717.52 h98.43 r90
  text "1" at 174.99,3350.01 h60
  text "1" at 1670,3350.01 h60
  text "SRB 3" at 1635.22,3266.88 h49.21 r90
  text "2" at 165,3250.01 h60
  text "2" at 1660,3250.01 h60
  text "SRB 4" at 110,3248.87 h49.21 r90
  text "+" at 1665,3120.01 h60
  text "+" at 165,3115.01 h60
  text "Bias 3" at 2995,3090.25 h62.99 r90
  text "Bias 4" at 1565,3087.26 h62.99 r90
  text "VREF 3" at 1635,3023.87 h49.21 r90
  text "-" at 1665,3020.01 h60
  text "VREF 4" at 110,3018.44 h49.21 r90
  text "-" at 165,3015 h60
  text "Ref  Inv  In  Out" at 2830,2975 h62.99 r90
  text "Ref  Inv  In  Out" at 1390,2970 h62.99 r90
  text "VREF 2" at 1900,2684.15 h49.21
  text "-" at 2105.01,2670 h60
  text "+" at 2205.01,2670 h60
  text "2" at 2330.01,2665 h60
  text "1" at 2440,2665 h60
  text "C" at 2587.52,2530 h98.43
  text "R" at 2696.75,2530 h98.43
  text "SRB 2" at 2339.93,2505 h49.21
  text "1" at 3065,2380.84 h60
  text "2" at 3055,2280.84 h60
  text "3" at 3055,2180.84 h60
  text "4" at 3055,2080.84 h60
  text "5" at 3055,1980.84 h60
  text "6" at 3055,1880.84 h60
  text "7" at 3055,1780.84 h60
  text "SAM-ICE JTAG" at 135,1738.44 h98.43 r90
  text "8" at 3055,1680.84 h60
  text "#2" at 2848.98,1515 h98.43
  text "Bias 2" at 2090.39,1505 h62.99
  text "Ref  Inv  In  Out" at 1980,1340 h62.99
  text "JTAG ENABLE" at 118.47,1295 h60
  text "VREF 1" at 1905,1259.15 h49.21
  text "-" at 2110.01,1250 h60
  text "+" at 2210.01,1250 h60
  text "2" at 2335,1250 h60
  text "1" at 2445,1250 h60
  text "C" at 2587.52,1115 h98.43
  text "R" at 2696.75,1115 h98.43
  text "SRB 1" at 2344.5,1085 h49.21
  text "1" at 3065,974.35 h60
  text "2" at 3055,874.35 h60
  text "3" at 3055,774.35 h60
  text "4" at 3055,674.35 h60
  text "5" at 3055,574.35 h60
  text "6" at 3055,474.35 h60
  text "7" at 3055,374.35 h60
  text "8" at 3055,274.35 h60
  text "POWER" at 1005.93,150 h50
  text "#1" at 2888.48,105 h98.43
  text "+ -" at 1077.56,50 h33
  text "Bias 1:  Ref  Inv  In  Out" at 1770,5 h62.99
Bottom Solder:
  lines w10: 0,0 0,4300 3125,4300 3125,0 0,0

## Text inside footprints (layer, text, board x,y; h text height)
P1: Top Overlay "-" at 2960,1062.69 h50; Top Overlay "+" at 2860,1104.34 h50 r270
P5: Top Overlay "-" at 2965.39,2469.18 h50; Top Overlay "+" at 2865.39,2510.83 h50 r270
P9: Top Overlay "-" at 1702.91,4084.65 h50; Top Overlay "+" at 1702.91,3984.65 h50
P13: Top Overlay "-" at 202.51,4084.65 h50; Top Overlay "+" at 202.51,3984.65 h50